# EAGLE board RM_finish (EAGLE 9.5.2)
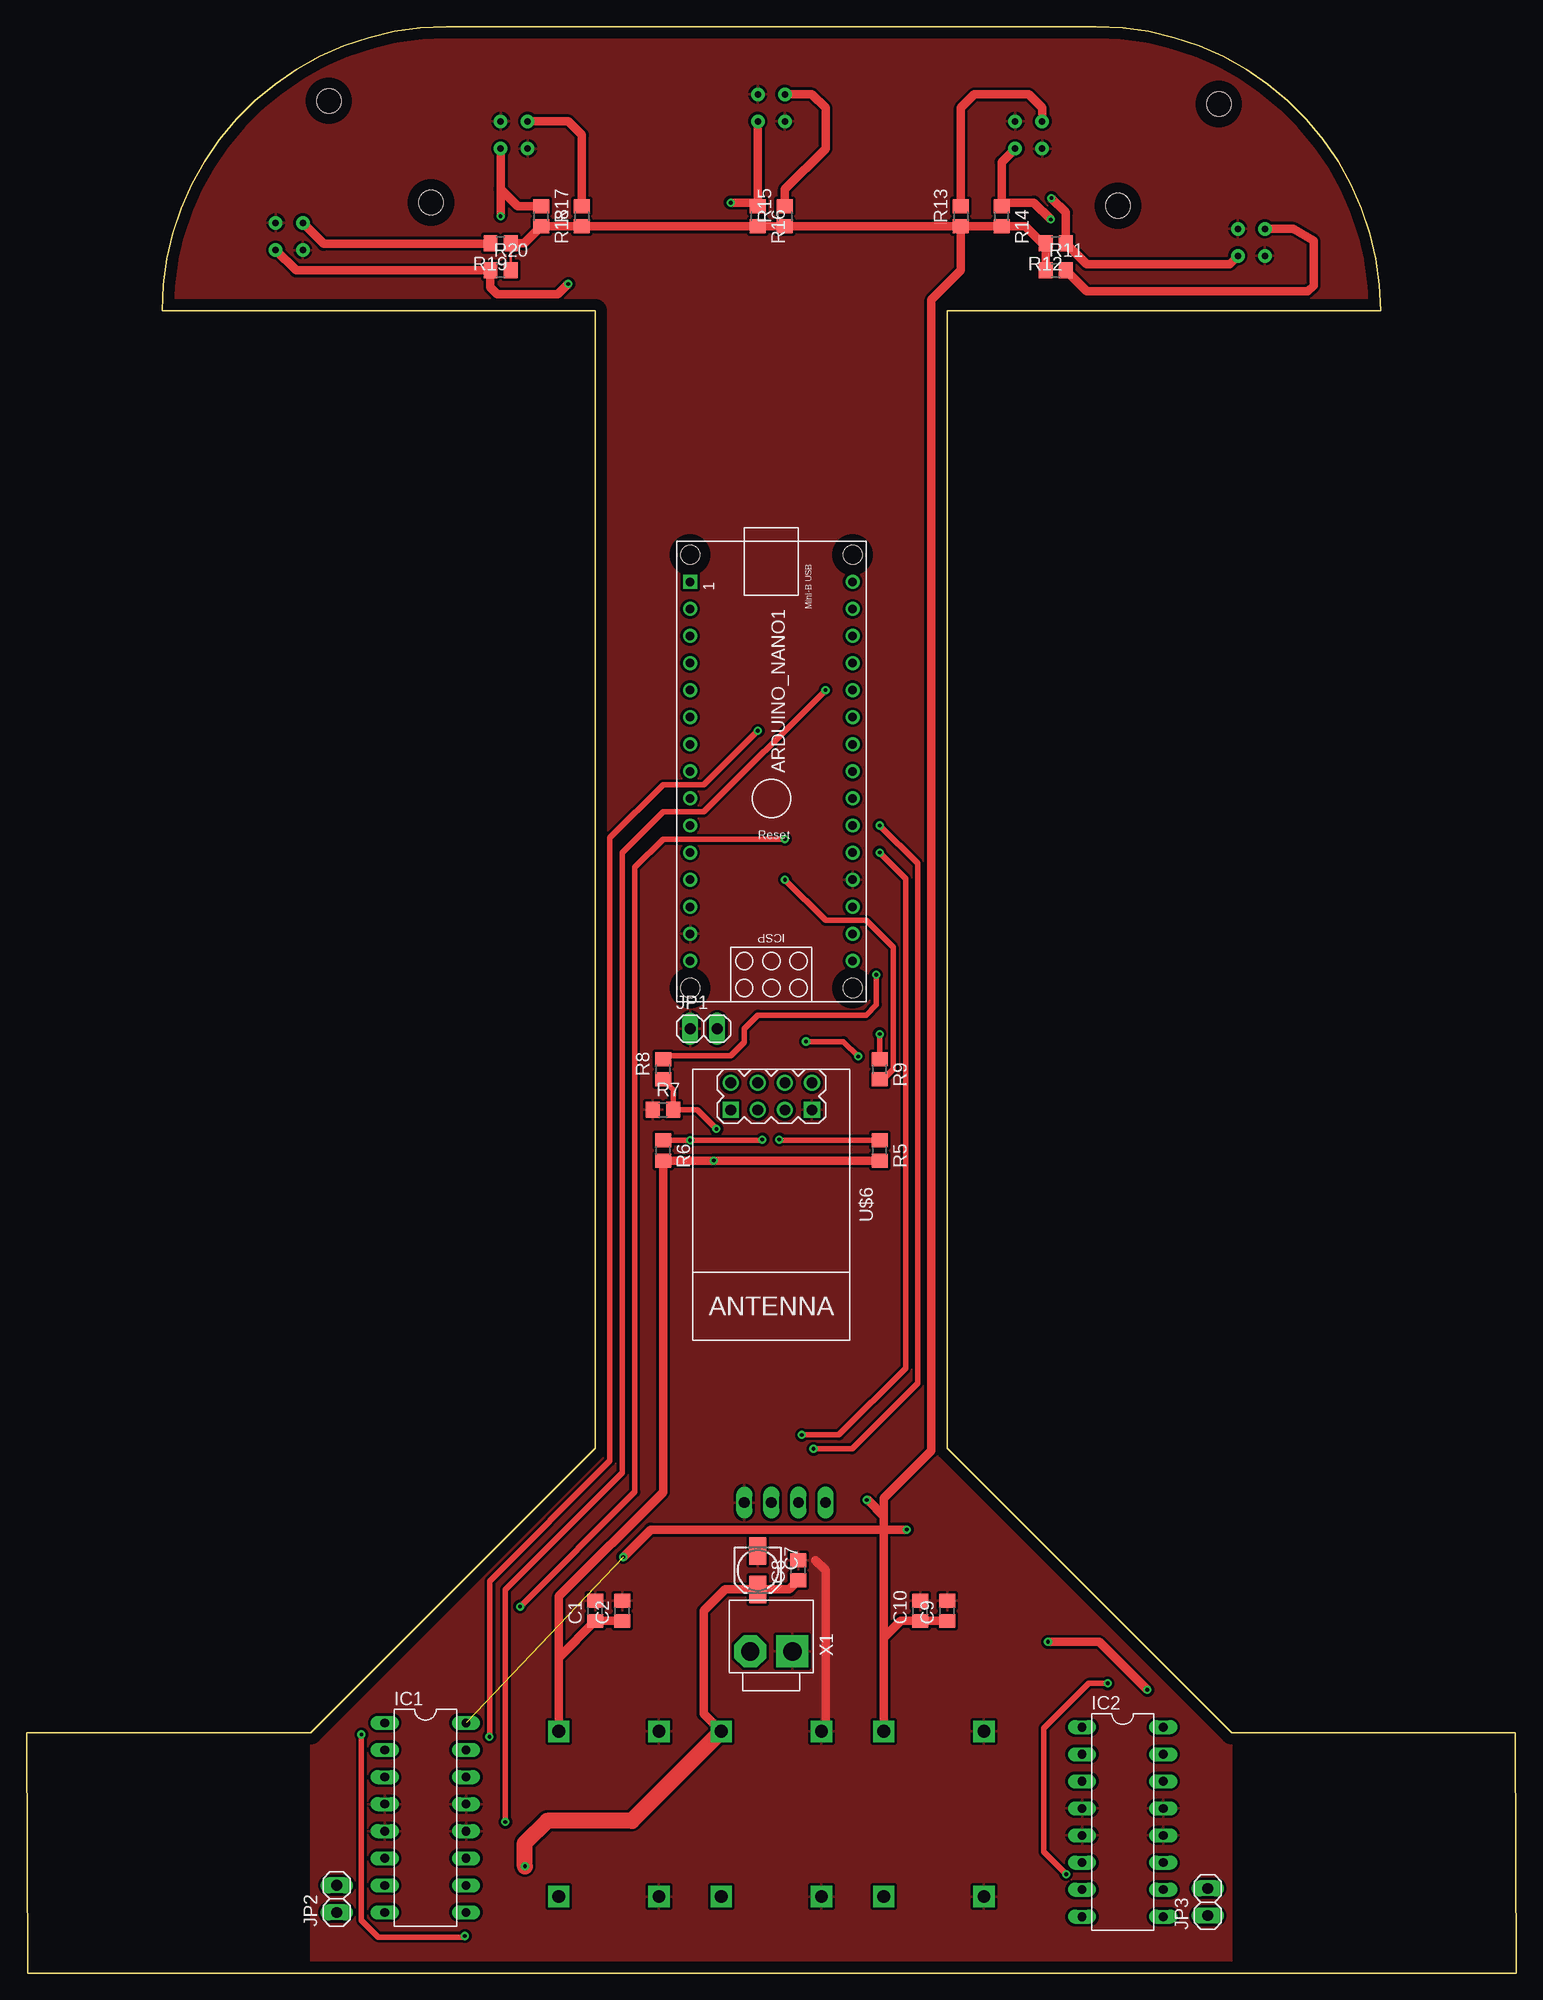
[diagram p0: board, top side]
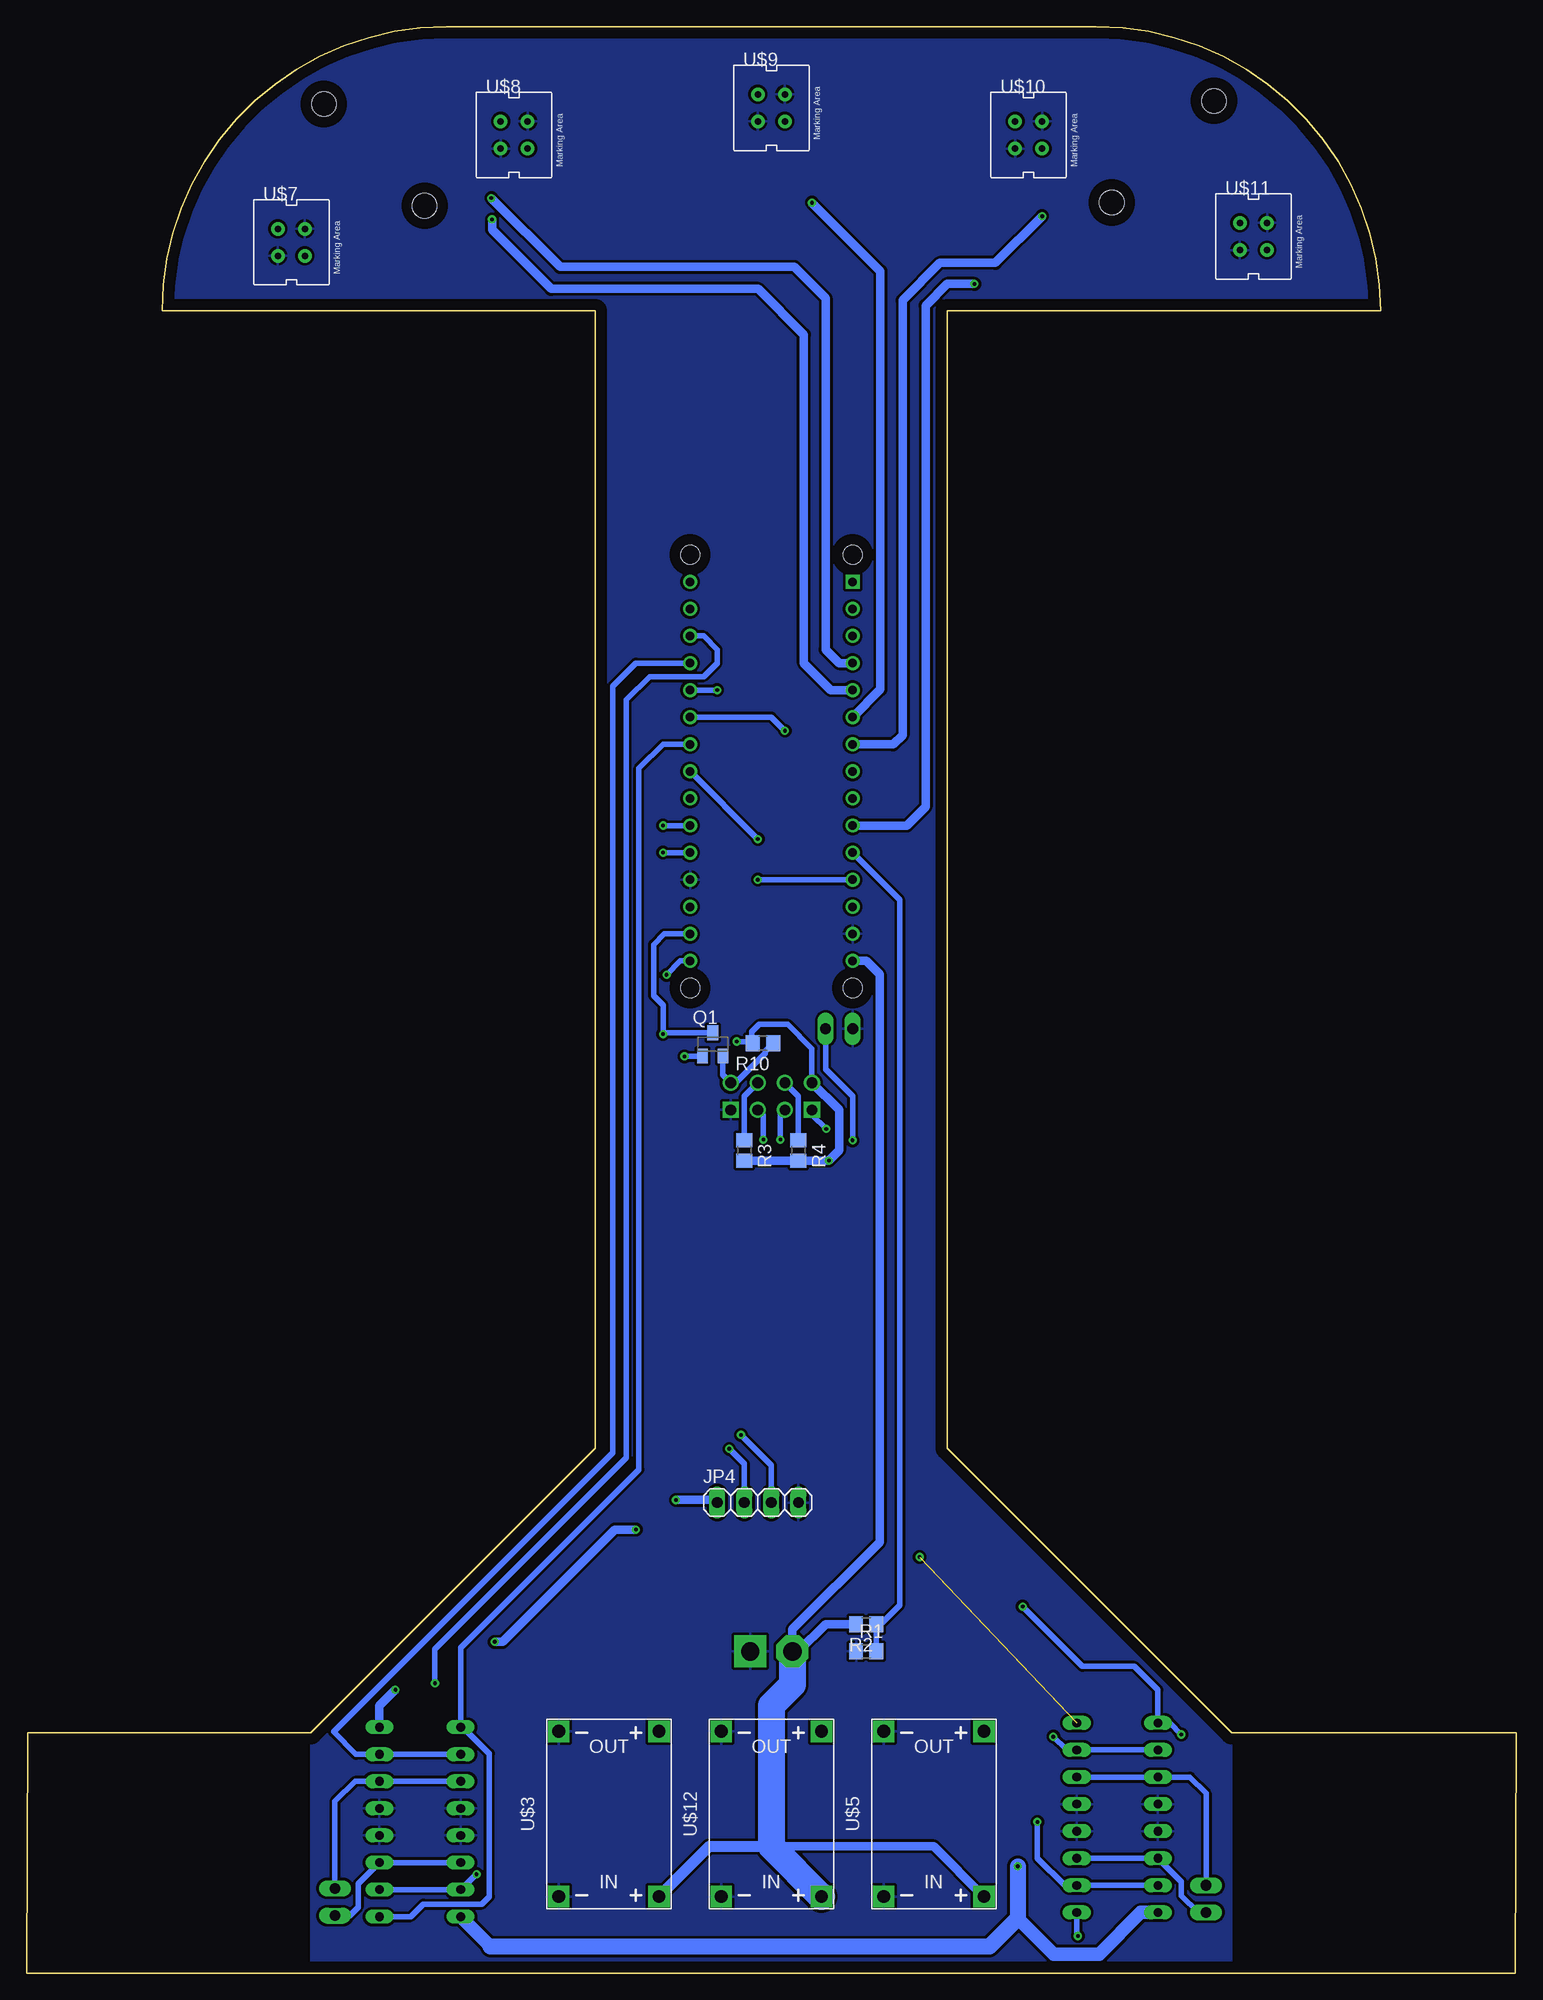
[diagram p1: board, bottom side, seen from below]

Size 139.7 x 182.59 mm. Coordinates in mm from the lower left corner, seen from the top.
Outline: 0.1,0 0,22.57 26.67,22.57 53.34,49.24 53.34,155.92 12.7,155.92 arc-90 39.37,182.59 100.33,182.59 arc-90 127,155.92 86.36,155.92 86.36,49.24 113.03,22.57 139.6,22.57 139.7,0 0.1,0
Copper layers (1*16): Top 0.035mm / dielectric 1.5mm / Bottom 0.035mm
Design rules "default *": minimum track width 6mil, minimum drill 0.35mm, track to track 10mil, track to pad 10mil, pad to pad 10mil, via to via 10mil, smd to smd 10mil, copper to edge 40mil, drill to drill 6mil, minimum pad ring 10mil, minimum via ring 8mil, stop-mask expansion 4mil, vias tented up to drill 0mil, thermal gap 10mil
Holes 2.3 mm at 37.92,166.09 28.34,175.63 111.82,175.34 102.37,165.79

## Footprints (pad centres in the part's own frame; a part is rotated, then mirrored left to right if it is on the bottom)
ARDUINO_NANO = drill 0.8 square: 1 -20.32,-7.62 | drill 0.8: 2 -17.78,-7.62; 3 -15.24,-7.62; 4 -12.7,-7.62; 5 -10.16,-7.62; 6 -7.62,-7.62; 7 -5.08,-7.62; 8 -2.54,-7.62; 9 0,-7.62; 10 2.54,-7.62; 11 5.08,-7.62; 12 7.62,-7.62; 13 10.16,-7.62; 14 12.7,-7.62; 15 15.24,-7.62; 16 15.24,7.62; 17 12.7,7.62; 18 10.16,7.62; 19 7.62,7.62; 20 5.08,7.62; 21 2.54,7.62; 22 0,7.62; 23 -2.54,7.62; 24 -5.08,7.62; 25 -7.62,7.62; 26 -10.16,7.62; 27 -12.7,7.62; 28 -15.24,7.62; 29 -17.78,7.62; 30 -20.32,7.62 | hole 1.778: -22.86,-7.62; -22.86,7.62; 17.78,7.62; 17.78,-7.62
C0805 = smd 1.3 x 1.5: 1 -0.95,0; 2 0.95,0
153CLV-0405 = smd 2.6 x 1.6: + 1.8,0; - -1.8,0
DIL16 = drill 0.813 long: 1 -8.89,-3.81; 2 -6.35,-3.81; 3 -3.81,-3.81; 4 -1.27,-3.81; 5 1.27,-3.81; 6 3.81,-3.81; 7 6.35,-3.81; 8 8.89,-3.81; 9 8.89,3.81; 10 6.35,3.81; 11 3.81,3.81; 12 1.27,3.81; 13 -1.27,3.81; 14 -3.81,3.81; 15 -6.35,3.81; 16 -8.89,3.81
1X02 = drill 1.016 long: 1 -1.27,0; 2 1.27,0
1X04 = drill 1.016 long: 1 -3.81,0; 2 -1.27,0; 3 1.27,0; 4 3.81,0
SOT23 = smd 1 x 1.4: 1 -0.95,-1.1; 2 0.95,-1.1; 3 0,1.1
R0805 = smd 1.3 x 1.5: 1 -0.95,0; 2 0.95,0
DC-DC-STEP-DOWN-MP2307 = drill 1.2 pad 2 square: IN+ -7.747,-4.699; IN- -7.747,4.699; OUT+ 7.747,-4.699; OUT- 7.747,4.699
WIRELESS-WIFI-ESP-01 = drill 1 square: A1 -8.89,3.81; D1 -8.89,-3.81 | drill 1: A2 -11.43,3.81; B1 -8.89,1.27; B2 -11.43,1.27; C1 -8.89,-1.27; C2 -11.43,-1.27; D2 -11.43,-3.81
4 = drill 0.61 pad 1.27: A -1.27,1.27; C 1.27,-1.27; E 1.27,1.27; K -1.27,-1.27
B2P-VH = drill 1.7 pad 3 square: 1 -1.98,0 | drill 1.7 pad 3 octagon: 2 1.98,0

## Placement (x,y rotation side)
ARDUINO_NANO1  [ARDUINO_NANO]  69.85,110.2 270 top
C1  100n  [C0805]  53.34,34 90 top
C2  1u  [C0805]  55.88,34 90 top
C7  22u  [153CLV-0405]  68.58,37.81 270 top
C8  100n  [C0805]  72.39,37.81 90 top
C9  100n  [C0805]  86.36,34 90 top
C10  10u  [C0805]  83.82,34 90 top
IC1  L293D  [DIL16]  37.4,14.6 270 top
IC2  L293D  [DIL16]  102.8,14.2 270 top
JP1  [1X02]  63.5,88.61 0 top
JP2  [1X02]  29.08,6.98 90 top
JP3  [1X02]  110.78,6.69 90 top
JP4  [1X04]  71.12,44.16 0 bottom
Q1  BSS123  [SOT23]  75.35,87.14 0 bottom
R1  1k  [R0805]  60.96,30.19 0 bottom
R2  2k2  [R0805]  60.96,32.73 180 bottom
R3  10k  [R0805]  72.39,77.18 270 bottom
R4  10k  [R0805]  67.31,77.18 270 bottom
R5  10k  [R0805]  80.01,77.18 270 top
R6  10k  [R0805]  59.69,77.18 270 top
R7  20k  [R0805]  59.69,80.99 0 top
R8  10k  [R0805]  59.69,84.8 90 top
R9  10k  [R0805]  80.01,84.8 270 top
R10  10k  [R0805]  70.63,87.24 180 bottom
R11  200  [R0805]  96.52,159.73 0 top
R12  20k  [R0805]  96.52,162.27 180 top
R13  200  [R0805]  87.63,164.81 90 top
R14  20k  [R0805]  91.44,164.81 270 top
R15  200  [R0805]  71.12,164.81 90 top
R16  20k  [R0805]  68.58,164.81 270 top
R17  200  [R0805]  52.07,164.81 90 top
R18  20k  [R0805]  48.26,164.81 270 top
R19  200  [R0805]  44.45,162.27 180 top
R20  20k  [R0805]  44.45,159.73 0 top
U$3  DC-DC-STEP-DOWN-MP2307  [DC-DC-STEP-DOWN-MP2307]  85.09,14.95 90 bottom
U$5  DC-DC-STEP-DOWN-MP2307  [DC-DC-STEP-DOWN-MP2307]  54.61,14.95 90 bottom
U$6  WIRELESS-WIFI-ESP-01  [WIRELESS-WIFI-ESP-01]  69.85,72.1 270 top
U$7  CNY70  [4]  114.87,162.36 0 bottom
U$8  CNY70  [4]  93.98,172.43 0 bottom
U$9  CNY70  [4]  69.85,174.97 0 bottom
U$10  CNY70  [4]  45.72,172.43 0 bottom
U$11  CNY70  [4]  24.63,162.91 0 bottom
U$12  DC-DC-STEP-DOWN-MP2307  [DC-DC-STEP-DOWN-MP2307]  69.85,14.95 90 bottom
X1  B2P-VH-B  [B2P-VH]  69.85,30.19 180 top

## Library data of the parts
ARDUINO_NANO1 = ArduinoNanoV30
C1 C2 C7-C10 = rcl; SPICEPREFIX: C
IC1 IC2 = st-microelectronics; MPN: L293D; OC_FARNELL: 9589619; OC_NEWARK: 56P8249
JP1-JP4 = pinhead
Q1 = transistor-small-signal
R1-R20 = rcl; SPICEPREFIX: R
U$3 U$5 U$12 = diy-modules (1)
U$6 = diy-modules
U$7-U$11 = cny70
X1 = con-JST VH

## Nets
3.3V: C1.1 C2.1 Q1.1 R3.2 R4.2 R5.2 R6.2 R10.2 U$5.OUT+ U$6.D2
5.0V: C9.1 C10.1 IC1.16 IC2.16 JP4.1 R11.1 R12.2 R13.1 R14.2 R15.1 R16.2 R17.1 R18.2 R19.1 R20.2 U$3.OUT+
C5.0V: ARDUINO_NANO1.12 R9.2
CH_PD: R3.1 U$6.B2
ECHO: ARDUINO_NANO1.20 JP4.3
GND: ARDUINO_NANO1.14 ARDUINO_NANO1.19 C1.2 C2.2 C7.- C8.2 C9.2 C10.2 IC1.4 IC1.5 IC1.12 IC1.13 IC2.4 IC2.5 IC2.12 IC2.13 JP1.1 JP4.4 R1.1 R7.1 U$3.IN- U$3.OUT- U$5.IN- U$5.OUT- U$6.A1 U$7.E U$7.K U$8.E U$8.K U$9.E U$9.K U$10.E U$10.K U$11.E U$11.K U$12.IN- U$12.OUT- X1.1
GPIO0: JP1.2 R6.1 U$6.C1
GPIO2: R5.1 U$6.B1
IN1L: ARDUINO_NANO1.25 IC1.2 IC1.15
IN1P: ARDUINO_NANO1.27 IC2.2 IC2.15
IN2L: ARDUINO_NANO1.26 IC1.7 IC1.10
IN2P: ARDUINO_NANO1.28 IC2.7 IC2.10
MOTL1: IC1.3 IC1.14 JP2.2
MOTL2: IC1.6 IC1.11 JP2.1
MOTP1: IC2.3 IC2.14 JP3.2
MOTP2: IC2.6 IC2.11 JP3.1
N$2: R11.2 U$7.A
N$3: R13.2 U$8.A
N$4: R15.2 U$9.A
N$5: R17.2 U$10.A
N$6: R19.2 U$11.A
PWML: ARDUINO_NANO1.23 IC1.1 IC1.9
PWMP: ARDUINO_NANO1.24 IC2.1 IC2.9
RST: R4.1 U$6.C2
RX: ARDUINO_NANO1.17 Q1.3 R9.1
SUPPLY_V: ARDUINO_NANO1.11 R1.2 R2.1
TRIG: ARDUINO_NANO1.21 JP4.2
TX: ARDUINO_NANO1.16 R8.2
UC1: ARDUINO_NANO1.4 R12.1 U$7.C
UC2: ARDUINO_NANO1.5 R14.1 U$8.C
UC3: ARDUINO_NANO1.6 R16.1 U$9.C
UC4: ARDUINO_NANO1.7 R18.1 U$10.C
UC5: ARDUINO_NANO1.10 R20.1 U$11.C
URXD: R7.2 R8.1 U$6.D1
UTXD: Q1.2 R10.1 U$6.A2
V+: ARDUINO_NANO1.15 R2.2 U$3.IN+ U$5.IN+ U$12.IN+ X1.2
VS: C7.+ C8.1 IC1.8 IC2.8 U$12.OUT+

## Tracks (layer width: path | path; a pad name or v marks a point on that pad's centre or on a via)
3.3V  (via drill 0.35)
  Top 0.508: v73.1,87.4 76.6,87.4 v78,86
  Top 0.813: R5.2 v64.45,76.23 R6.2 59.69,45.13 49.91,35.35 49.91,29.62 | U$5.OUT+ 49.91,29.62 | 49.91,29.62 C1.1 C2.1
  Bottom 0.508: U$6.D2 66.04,86.74 68.3,89 71,89 71.7,88.3 71.7,87.36 R10.2 71.74,87.4 v73.1,87.4 | v78,86 76.34,86 Q1.1
  Bottom 0.813: R3.2 R4.2 v64.45,76.23 63.5,77.18 63.5,80.99 U$6.D2
5.0V  (via drill 0.35)  (1 unrouted)
  Top 0.254: R19.1 R20.2
  Top 0.813: U$3.OUT+ 80.39,31.46 | 80.39,31.46 80.39,41.62 | 80.39,41.62 80.39,42.89 | 80.39,42.89 80.39,44.54 84.86,49.01 84.86,156.96 87.63,159.73 R13.1 | 80.39,31.46 81.98,33.05 C10.1 C9.1 | v55.95,39.05 58.52,41.62 80.39,41.62 | R13.1 R15.1 R16.2 R17.1 R18.2 46.67,162.27 R19.1 | R11.1 R12.2 95.25,162.27 93.66,163.86 R14.2 R13.1 | v82.55,41.62 80.39,41.62 | v95.8,31.1 100.6,31.1 v105.11,26.59 | 80.39,42.89 78.88,44.4 v78.8,44.4
  Bottom 0.813: v82.55,41.62 84.53,41.62 95.05,31.1 v95.8,31.1 | v78.8,44.4 75.17,44.4 JP4.1 | v105.11,26.59 106.61,25.09 IC2.16
C5.0V  (via drill 0.35)
  Top 0.254: 80.33,83.85 R9.2
  Top 0.508: v71.12,102.58 74.93,98.77 78.74,98.77 81.28,96.23 81.28,84.8 80.33,83.85
  Bottom 0.508: v71.12,102.58 ARDUINO_NANO1.12
CH_PD
  Bottom 0.508: R3.1 72.39,82.26 U$6.B2
ECHO  (via drill 0.35)
  Top 0.508: v80.01,105.12 82.45,102.68 82.45,56.76 76.19,50.5 v72.7,50.5
  Bottom 0.508: v72.7,50.5 69.85,47.65 JP4.3 | v80.01,105.12 ARDUINO_NANO1.20
GND
  Top 0.813: 73.98,38.76 74.93,37.81 74.93,23.08 U$12.OUT-
  pour Bottom: 113.03,0 26.67,0 26.67,22.57 53.34,49.24 53.34,155.92 12.7,155.92 arc-90 39.37,182.59 100.33,182.59 arc-90 127,155.92 86.36,155.92 86.36,49.24 113.03,22.57
  pour Top: 26.67,22.57 26.67,0 113.03,0 113.03,22.57 86.36,49.24 86.36,155.92 127,155.92 arc90 100.33,182.59 39.37,182.59 arc90 12.7,155.92 53.34,155.92 53.34,49.24
GPIO0  (via drill 0.35)
  Top 0.508: R6.1 v62.23,78.13 68.93,78.13 v69,78.2
  Bottom 0.508: v62.23,78.13 62.23,82.26 64.77,84.8 JP1.2 | v69,78.2 69,80.57 U$6.C1
GPIO2  (via drill 0.35)
  Top 0.508: v70.6,78.2 70.67,78.13 R5.1
  Bottom 0.508: v70.6,78.2 70.6,80.47 U$6.B1
IN1L  (via drill 0.35)
  Top 0.508: v68.58,116.55 63.5,111.47 59.69,111.47 54.71,106.49 54.71,48.07 43.44,36.8 43.44,22.23 v43.4,22.2
  Bottom 0.508: v68.58,116.55 69.85,117.82 ARDUINO_NANO1.25 | IC1.2 IC1.15 42.16,20.95 v43.4,22.2
IN1P
  Bottom 0.508: ARDUINO_NANO1.27 82.55,122.9 84.72,120.73 84.72,48.84 110.91,22.65 108.81,20.55 IC2.15 | IC2.2 IC2.15 | IC2.15 107.45,20.55
IN2L  (via drill 0.35)
  Top 0.508: v74.93,120.36 63.5,108.93 59.69,108.93 55.88,105.12 55.88,46.97 44.91,36 v44.91,14.21 v44.9,14.2
  Bottom 0.508: IC1.7 IC1.10 42.35,8.25 44.9,10.8 v44.9,14.2 | v74.93,120.36 ARDUINO_NANO1.26
IN2P  (via drill 0.35)
  Top 0.508: v97.5,9.3 95.4,11.4 95.4,23 99.6,27.2 v101.4,27.2
  Bottom 0.508: ARDUINO_NANO1.28 76.2,125.44 74.93,124.17 74.93,122.9 76.2,121.63 81.28,121.63 83.45,119.46 83.45,48.34 101.4,30.39 v101.4,27.2 | v97.5,9.3 97.54,9.3 IC2.7 IC2.10
MOTL1
  Bottom 0.508: IC1.14 IC1.3 30.6,18.4 29.08,16.88 JP2.2
MOTL2
  Bottom 0.508: IC1.11 IC1.6 31.4,8.6 31.4,7.3 29.81,5.71 JP2.1
MOTP1
  Bottom 0.508: IC2.3 IC2.14 108.89,18.01 110.78,16.12 JP3.2
MOTP2
  Bottom 0.508: IC2.6 IC2.11 108.6,8.4 108.6,6.2 109.38,5.42 JP3.1
N$2
  Top 0.813: U$7.A 118.81,163.63 120.7,162.5 120.7,158.3 120.17,157.78 99.42,157.78 R11.2
N$3
  Top 0.813: R13.2 87.63,174.97 88.9,176.24 93.98,176.24 95.25,174.97 U$8.A
N$4
  Top 0.813: U$9.A 73.66,176.24 74.93,174.97 74.93,171.16 71.12,167.35 R15.2
N$5
  Top 0.813: U$10.A 50.8,173.7 52.07,172.43 R17.2
N$6
  Top 0.813: R19.2 43.45,162.22 27.86,162.22 U$11.A
PWML  (via drill 0.35)
  Top 0.508: v46.28,34.4 57.05,45.17 57.05,103.75 59.69,106.39 v71.12,106.39 | v41.1,3.5 41,3.4 33,3.4 31.4,5 v31.4,22.4
  Bottom 0.508: IC1.9 41.21,3.61 v41.1,3.5 | v31.4,22.4 32.49,23.49 IC1.1 33.59,26.59 35.8,28.8 40.68,28.8 v46.28,34.4 | v71.12,106.39 ARDUINO_NANO1.23
PWMP
  Bottom 0.508: ARDUINO_NANO1.24 80.01,115.28 82.28,113.01 82.28,47.24 98.99,30.53 IC2.1 98.79,23.09 96.3,20.6 96.3,7.2 97,6.5 102.5,6.5 103.69,5.31 IC2.9
RST
  Bottom 0.508: R4.1 67.31,82.26 U$6.C2
RX  (via drill 0.35)
  Top 0.508: R9.1 v80.01,88.1
  Bottom 0.508: Q1.3 79.87,88.24 v80.01,88.1 80.01,90.81 80.9,91.7 80.9,96.5 79.9,97.5 ARDUINO_NANO1.17
SUPPLY_V
  Bottom 0.508: R1.2 R2.1 59.61,32.73 57.82,34.52 57.82,100.71 ARDUINO_NANO1.11
TRIG  (via drill 0.35)
  Top 0.508: v80.01,107.66 83.56,104.11 83.56,55.33 77.43,49.2 v73.8,49.2
  Bottom 0.508: v73.8,49.2 72.39,47.79 JP4.2 | v80.01,107.66 ARDUINO_NANO1.21
TX  (via drill 0.35)
  Top 0.254: R8.2 60.01,86.07
  Top 0.508: 60.01,86.07 66.04,86.07 67.31,87.34 67.31,88.61 68.58,89.88 78.74,89.88 79.71,90.85 79.71,93.69 v79.68,93.66
  Bottom 0.508: v79.68,93.66 78.39,94.96 ARDUINO_NANO1.16
UC1  (via drill 0.35)
  Top 0.813: v96.12,166.51 97.47,165.16 R12.1 99.42,160.32 112.83,160.32 U$7.C
  Bottom 0.813: v96.12,166.51 89.67,160.06 67.7,160.06 64.77,157.13 64.77,124.17 63.5,122.9 ARDUINO_NANO1.4
UC2  (via drill 0.35)
  Top 0.254: R14.1 91.76,166.08
  Top 0.813: U$8.C 91.44,169.89 R14.1 | 91.76,166.08 94.48,166.08 v96.05,164.51
  Bottom 0.813: ARDUINO_NANO1.5 64.26,120.36 66.8,122.9 66.8,153.7 71.1,158 90.5,158 96.05,163.55 v96.05,164.51
UC3  (via drill 0.35)
  Top 0.254: R16.1 68.26,166.08
  Top 0.813: U$9.C R16.1 | 68.26,166.08 v66.04,166.08
  Bottom 0.813: v66.04,166.08 59.62,159.66 59.62,120.43 ARDUINO_NANO1.6
UC4  (via drill 0.35)
  Top 0.813: U$10.C 44.45,167.35 | 44.45,167.35 46.04,165.76 R18.1 | 44.45,167.35 v44.45,164.81
  Bottom 0.813: v44.45,164.81 48.83,160.43 54.04,160.43 57.55,156.92 57.55,116.15 58.42,115.28 ARDUINO_NANO1.7
UC5  (via drill 0.35)
  Top 0.813: U$11.C 25.27,159.73 R20.1 43.5,158.14 44.15,157.49 49.83,157.49 v50.8,158.46
  Bottom 0.813: v50.8,158.46 53.34,158.46 55.38,156.42 55.38,109.43 57.15,107.66 ARDUINO_NANO1.10
URXD  (via drill 0.35)
  Top 0.508: R8.1 60.64,82.9 R7.2 62.91,80.99 v64.7,79.2
  Bottom 0.508: v64.7,79.2 66.04,80.54 U$6.D1
UTXD
  Bottom 0.508: Q1.2 74.4,84.27 U$6.A2 73.17,83.53 70.42,86.28 70.42,86.5 R10.1
V+
  Bottom 0.254: X1.2 67.31,30.19
  Bottom 0.813: U$5.IN+ 54.61,11.9 69.85,11.9 | 67.31,30.19 64.77,32.73 R2.2 | ARDUINO_NANO1.15 60.96,94.96 59.69,93.69 59.69,40.45 67.87,32.27 X1.2
  Bottom 1.016: U$3.IN+ 75.69,11.9 69.85,11.9
  Bottom 2.54: X1.2 67.87,27.09 69.85,25.11 69.85,11.9 U$12.IN+
VS  (via drill 0.35)
  Top 0.813: U$12.OUT+ 63.5,24.35 63.5,34 65.51,36.01 C7.+ 71.54,36.01 C8.1
  Top 1.524: U$12.OUT+ 56.76,14.31 48.82,14.31 46.74,12.23 v46.74,10.04
  Bottom 1.27: 96.18,2.5 IC2.8 | IC1.8 35.19,5.71 39.1,1.8 43.38,1.8 46.74,5.16
  Bottom 1.524: v46.74,10.04 46.74,5.16 49.4,2.5 96.18,2.5